# EAGLE board Qwiic_Lidar_Lite-Panel (EAGLE 9.4.2), part 1 of 3
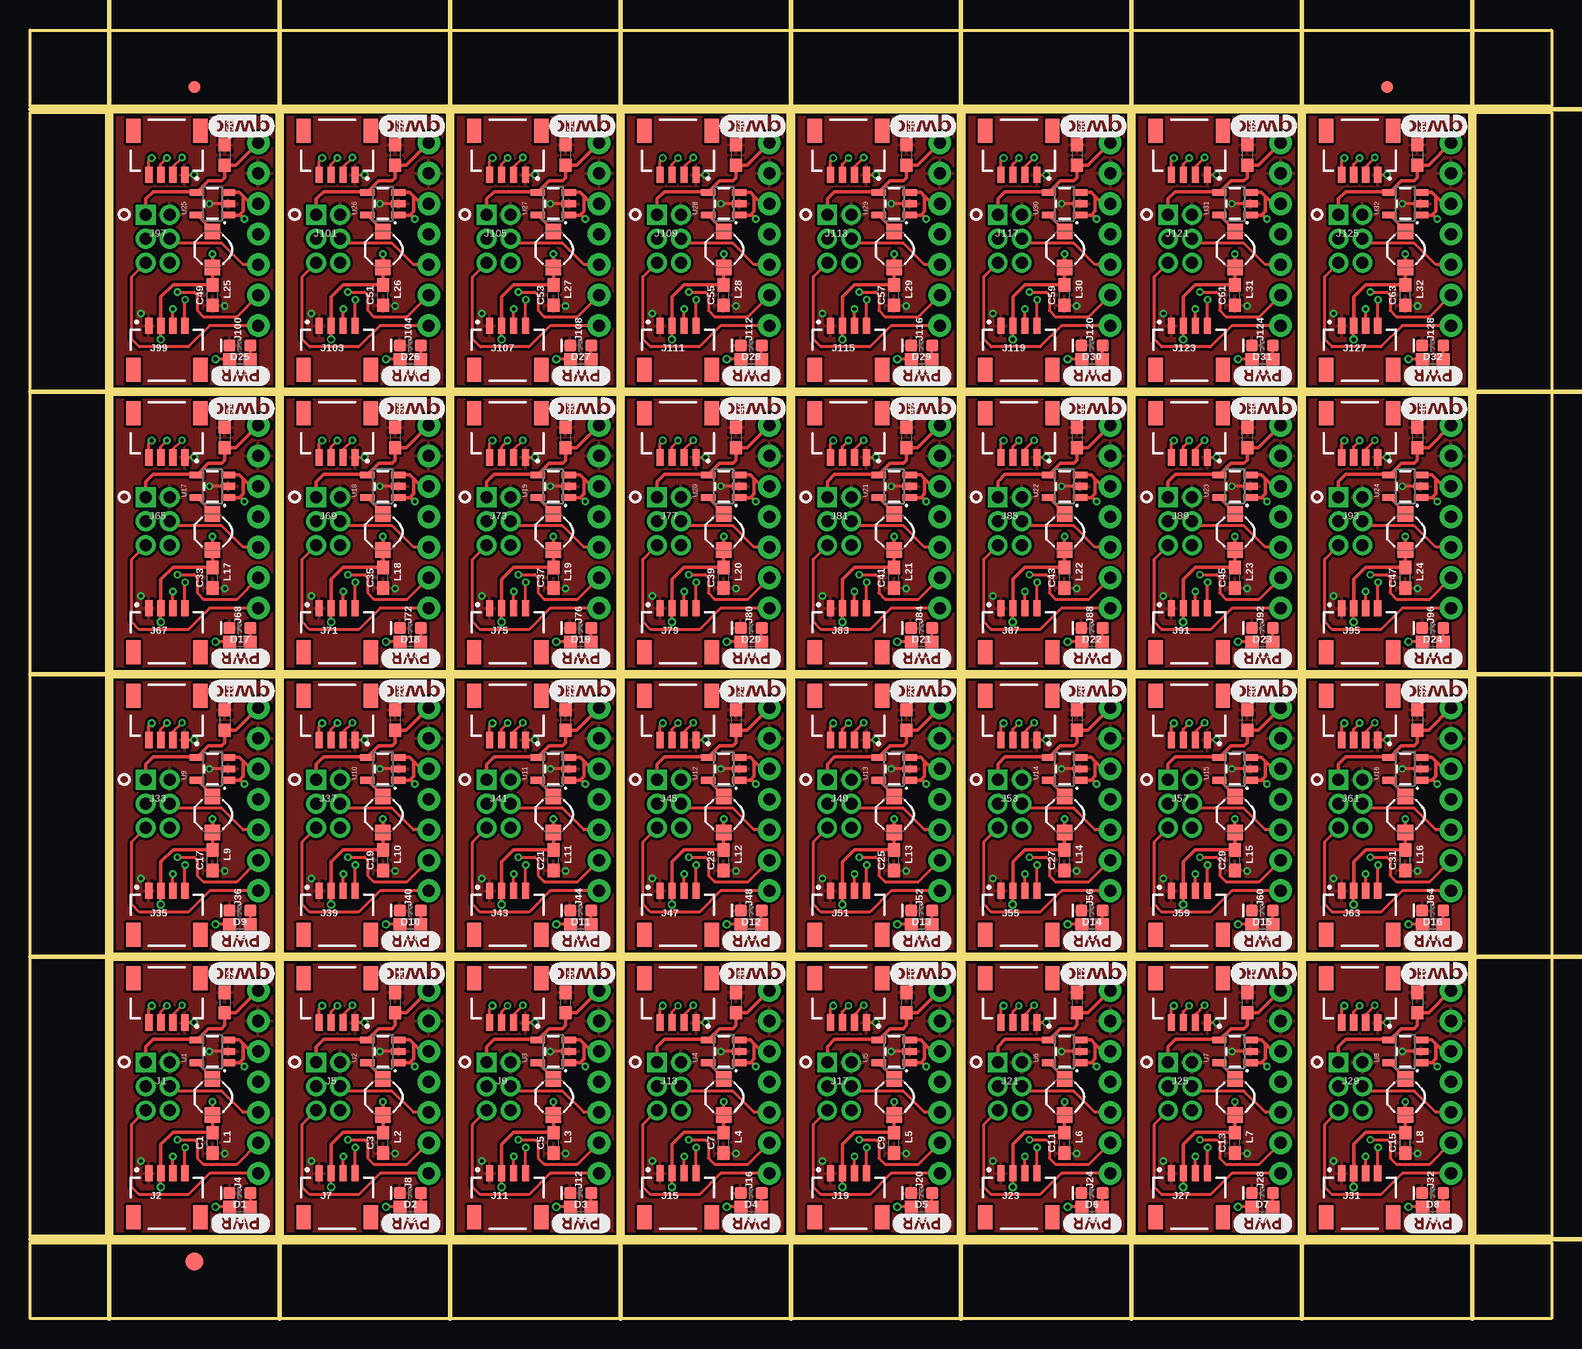
[diagram p0: board, top side]
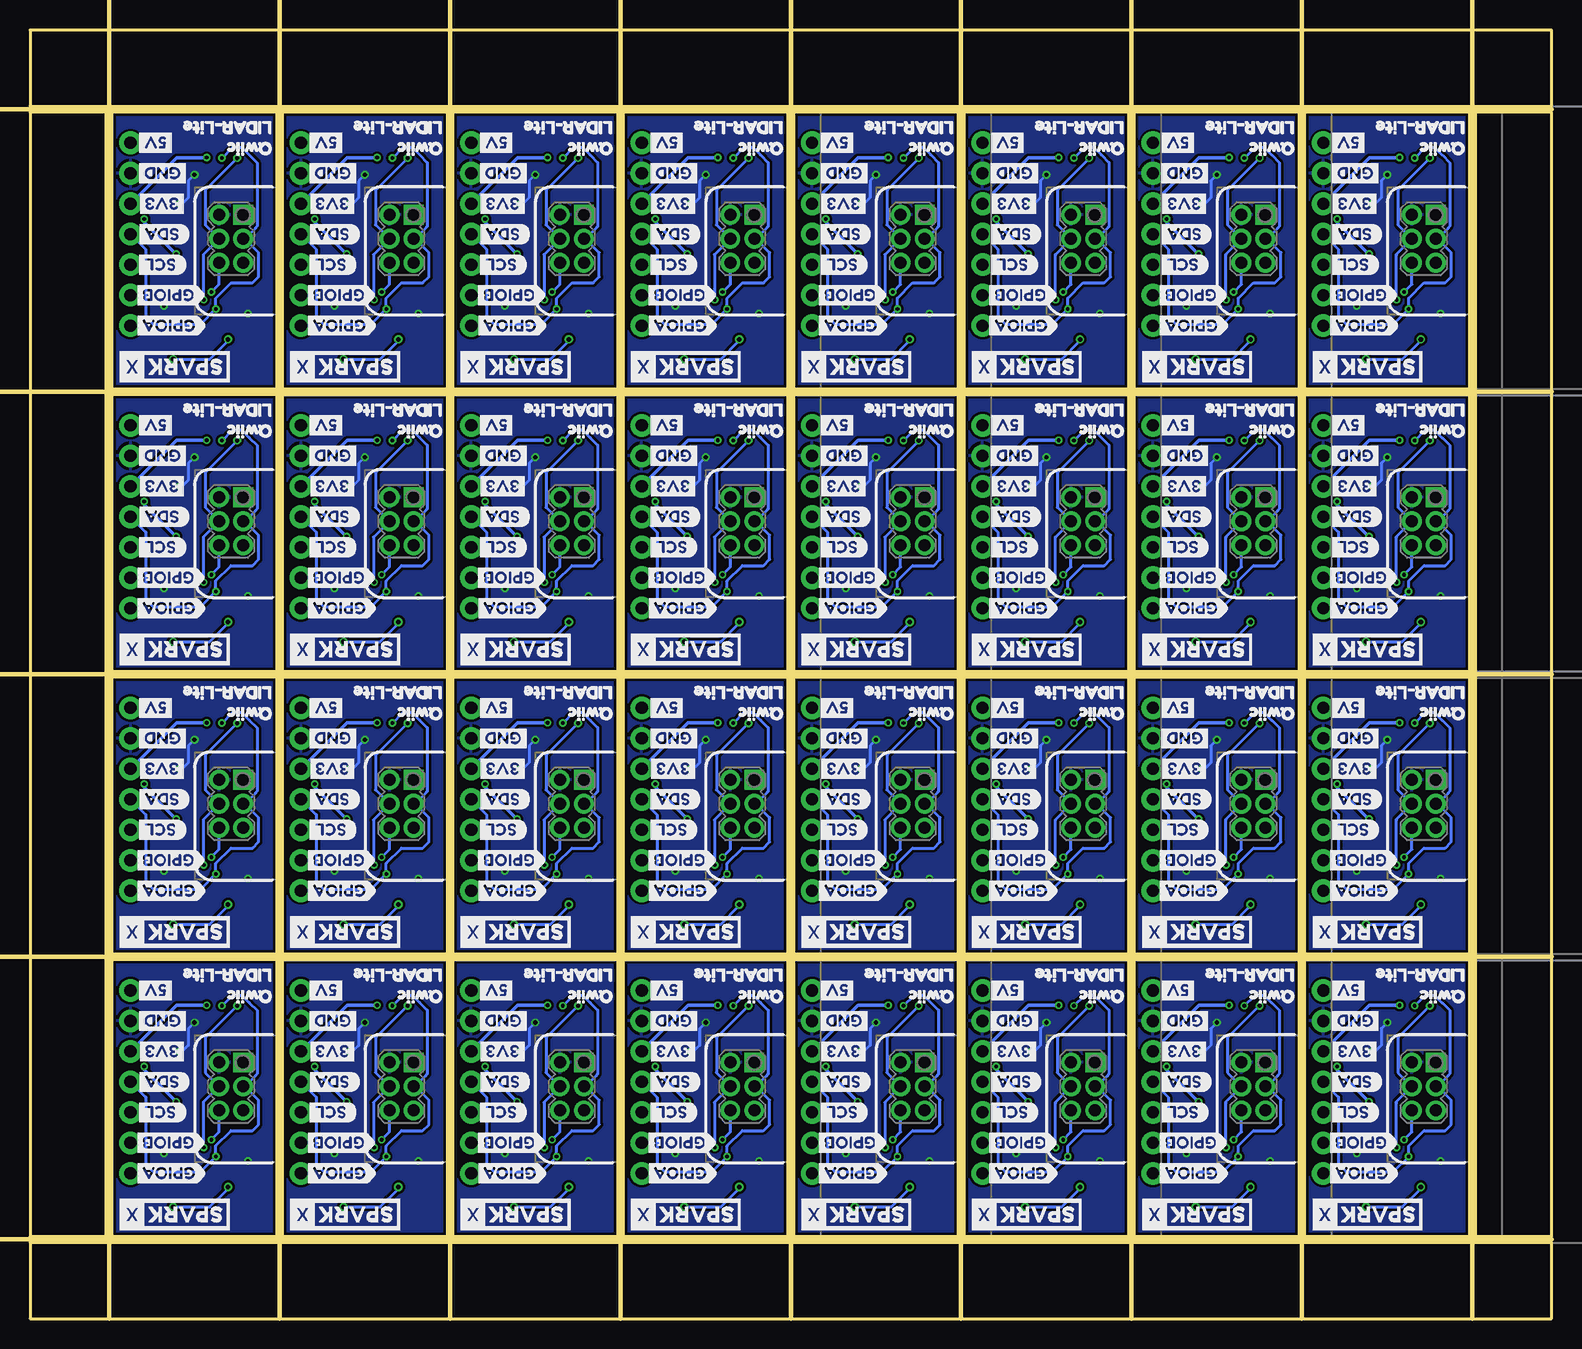
[diagram p1: board, bottom side, seen from below]

Size 126.84 x 107.39 mm. Coordinates in mm from the lower left corner, seen from the top.
Outline: 20.55,29.9 6.86,29.9 6.86,6.86 20.55,6.86 20.55,29.9
Outline: 34.76,29.9 21.06,29.9 21.06,6.86 34.76,6.86 34.76,29.9
Outline: 48.96,29.9 35.27,29.9 35.27,6.86 48.96,6.86 48.96,29.9
Outline: 63.17,29.9 49.47,29.9 49.47,6.86 63.17,6.86 63.17,29.9
Outline: 77.37,29.9 63.67,29.9 63.67,6.86 77.37,6.86 77.37,29.9
Outline: 91.57,29.9 77.88,29.9 77.88,6.86 91.57,6.86 91.57,29.9
Outline: 105.78,29.9 92.08,29.9 92.08,6.86 105.78,6.86 105.78,29.9
Outline: 119.98,29.9 106.29,29.9 106.29,6.86 119.98,6.86 119.98,29.9
Outline: 20.55,53.44 6.86,53.44 6.86,30.4 20.55,30.4 20.55,53.44
Outline: 34.76,53.44 21.06,53.44 21.06,30.4 34.76,30.4 34.76,53.44
Outline: 48.96,53.44 35.27,53.44 35.27,30.4 48.96,30.4 48.96,53.44
Outline: 63.17,53.44 49.47,53.44 49.47,30.4 63.17,30.4 63.17,53.44
Outline: 77.37,53.44 63.67,53.44 63.67,30.4 77.37,30.4 77.37,53.44
Outline: 91.57,53.44 77.88,53.44 77.88,30.4 91.57,30.4 91.57,53.44
Outline: 105.78,53.44 92.08,53.44 92.08,30.4 105.78,30.4 105.78,53.44
Outline: 119.98,53.44 106.29,53.44 106.29,30.4 119.98,30.4 119.98,53.44
Outline: 20.55,76.99 6.86,76.99 6.86,53.95 20.55,53.95 20.55,76.99
Outline: 34.76,76.99 21.06,76.99 21.06,53.95 34.76,53.95 34.76,76.99
Outline: 48.96,76.99 35.27,76.99 35.27,53.95 48.96,53.95 48.96,76.99
Outline: 63.17,76.99 49.47,76.99 49.47,53.95 63.17,53.95 63.17,76.99
Outline: 77.37,76.99 63.67,76.99 63.67,53.95 77.37,53.95 77.37,76.99
Outline: 91.57,76.99 77.88,76.99 77.88,53.95 91.57,53.95 91.57,76.99
Outline: 105.78,76.99 92.08,76.99 92.08,53.95 105.78,53.95 105.78,76.99
Outline: 119.98,76.99 106.29,76.99 106.29,53.95 119.98,53.95 119.98,76.99
Outline: 20.55,100.53 6.86,100.53 6.86,77.5 20.55,77.5 20.55,100.53
Outline: 34.76,100.53 21.06,100.53 21.06,77.5 34.76,77.5 34.76,100.53
Outline: 48.96,100.53 35.27,100.53 35.27,77.5 48.96,77.5 48.96,100.53
Outline: 63.17,100.53 49.47,100.53 49.47,77.5 63.17,77.5 63.17,100.53
Outline: 77.37,100.53 63.67,100.53 63.67,77.5 77.37,77.5 77.37,100.53
Outline: 91.57,100.53 77.88,100.53 77.88,77.5 91.57,77.5 91.57,100.53
Outline: 105.78,100.53 92.08,100.53 92.08,77.5 105.78,77.5 105.78,100.53
Outline: 119.98,100.53 106.29,100.53 106.29,77.5 119.98,77.5 119.98,100.53
Outline: 0,6.35 126.84,6.35 126.84,0 0,0 0,6.35
Outline: 120.49,100.53 126.84,100.53 126.84,6.86 120.49,6.86 120.49,100.53
Outline: 0,107.39 126.84,107.39 126.84,101.04 0,101.04 0,107.39
Outline: 0,100.53 6.35,100.53 6.35,6.86 0,6.86 0,100.53
Copper layers (1*16): Top 0.035mm / dielectric 1.5mm / Bottom 0.035mm
Design rules "SparkFun-2-layer-PCBWay-LIMIT": minimum track width 6mil, minimum drill 0.3mm, track to track 6mil, track to pad 6mil, pad to pad 6mil, via to via 6mil, smd to smd 6mil, copper to edge 6mil, drill to drill 6mil, minimum pad ring 6mil, minimum via ring 6mil, stop-mask expansion 4mil, vias tented up to drill 25mil, thermal gap 10mil
Milling: 14 lines

## Footprints (pad centres in the part's own frame; a part is rotated, then mirrored left to right if it is on the bottom)
0603 = smd 1.1 x 1: 1 -0.85,0; 2 0.85,0
LED-0603 = smd 1 x 1: A -0.877,0; C 0.877,0
FIDUCIAL-1X2 = smd 1 x 1: 1 0,0
FIDUCIAL-1.5X3 = smd 1.5 x 1.5: 1 0,0
JST04_1MM_RA = smd 0.6 x 1.35: 1 -1.5,0; 2 -0.5,0; 3 0.5,0; 4 1.5,0 | smd 1.2 x 2: NC1 2.8,-3.675; NC2 -2.8,-3.675
CONN_3X2_2MM = drill 1 pad 1.651 square: 1 -2,1 | drill 1 pad 1.651: 2 -2,-1; 3 0,1; 4 0,-1; 5 2,1; 6 2,-1
1X07_NO_SILK = drill 1.016 pad 1.88: 1 0,0; 2 2.54,0; 3 5.08,0; 4 7.62,0; 5 10.16,0; 6 12.7,0; 7 15.24,0
INDUCTOR_4.7UH = smd 1.3 x 1.3: P$1 -1.5,0; P$2 1.5,0
SOT23-5 = smd 0.55 x 1.2: 1 -0.95,-1.3; 2 0,-1.3; 3 0.95,-1.3; 4 0.95,1.3; 5 -0.95,1.3

## Placement (x,y rotation side)
C1  4.7uF  [0603]  15.22,14.66 90 top
C2  10uF  [0603]  16.24,26.34 270 top
C3  4.7uF  [0603]  29.42,14.66 90 top
C4  10uF  [0603]  30.44,26.34 270 top
C5  4.7uF  [0603]  43.63,14.66 90 top
C6  10uF  [0603]  44.64,26.34 270 top
C7  4.7uF  [0603]  57.83,14.66 90 top
C8  10uF  [0603]  58.85,26.34 270 top
C9  4.7uF  [0603]  72.04,14.66 90 top
C10  10uF  [0603]  73.05,26.34 270 top
C11  4.7uF  [0603]  86.24,14.66 90 top
C12  10uF  [0603]  87.26,26.34 270 top
C13  4.7uF  [0603]  100.44,14.66 90 top
C14  10uF  [0603]  101.46,26.34 270 top
C15  4.7uF  [0603]  114.65,14.66 90 top
C16  10uF  [0603]  115.66,26.34 270 top
C17  4.7uF  [0603]  15.22,38.2 90 top
C18  10uF  [0603]  16.24,49.89 270 top
C19  4.7uF  [0603]  29.42,38.2 90 top
C20  10uF  [0603]  30.44,49.89 270 top
C21  4.7uF  [0603]  43.63,38.2 90 top
C22  10uF  [0603]  44.64,49.89 270 top
C23  4.7uF  [0603]  57.83,38.2 90 top
C24  10uF  [0603]  58.85,49.89 270 top
C25  4.7uF  [0603]  72.04,38.2 90 top
C26  10uF  [0603]  73.05,49.89 270 top
C27  4.7uF  [0603]  86.24,38.2 90 top
C28  10uF  [0603]  87.26,49.89 270 top
C29  4.7uF  [0603]  100.44,38.2 90 top
C30  10uF  [0603]  101.46,49.89 270 top
C31  4.7uF  [0603]  114.65,38.2 90 top
C32  10uF  [0603]  115.66,49.89 270 top
C33  4.7uF  [0603]  15.22,61.75 90 top
C34  10uF  [0603]  16.24,73.43 270 top
C35  4.7uF  [0603]  29.42,61.75 90 top
C36  10uF  [0603]  30.44,73.43 270 top
C37  4.7uF  [0603]  43.63,61.75 90 top
C38  10uF  [0603]  44.64,73.43 270 top
C39  4.7uF  [0603]  57.83,61.75 90 top
C40  10uF  [0603]  58.85,73.43 270 top
C41  4.7uF  [0603]  72.04,61.75 90 top
C42  10uF  [0603]  73.05,73.43 270 top
C43  4.7uF  [0603]  86.24,61.75 90 top
C44  10uF  [0603]  87.26,73.43 270 top
C45  4.7uF  [0603]  100.44,61.75 90 top
C46  10uF  [0603]  101.46,73.43 270 top
C47  4.7uF  [0603]  114.65,61.75 90 top
C48  10uF  [0603]  115.66,73.43 270 top
C49  4.7uF  [0603]  15.22,85.29 90 top
C50  10uF  [0603]  16.24,96.98 270 top
C51  4.7uF  [0603]  29.42,85.29 90 top
C52  10uF  [0603]  30.44,96.98 270 top
C53  4.7uF  [0603]  43.63,85.29 90 top
C54  10uF  [0603]  44.64,96.98 270 top
C55  4.7uF  [0603]  57.83,85.29 90 top
C56  10uF  [0603]  58.85,96.98 270 top
C57  4.7uF  [0603]  72.04,85.29 90 top
C58  10uF  [0603]  73.05,96.98 270 top
C59  4.7uF  [0603]  86.24,85.29 90 top
C60  10uF  [0603]  87.26,96.98 270 top
C61  4.7uF  [0603]  100.44,85.29 90 top
C62  10uF  [0603]  101.46,96.98 270 top
C63  4.7uF  [0603]  114.65,85.29 90 top
C64  10uF  [0603]  115.66,96.98 270 top
D1  RED  [LED-0603]  17.51,10.47 180 top
D2  RED  [LED-0603]  31.71,10.47 180 top
D3  RED  [LED-0603]  45.91,10.47 180 top
D4  RED  [LED-0603]  60.12,10.47 180 top
D5  RED  [LED-0603]  74.32,10.47 180 top
D6  RED  [LED-0603]  88.53,10.47 180 top
D7  RED  [LED-0603]  102.73,10.47 180 top
D8  RED  [LED-0603]  116.93,10.47 180 top
D9  RED  [LED-0603]  17.51,34.01 180 top
D10  RED  [LED-0603]  31.71,34.01 180 top
D11  RED  [LED-0603]  45.91,34.01 180 top
D12  RED  [LED-0603]  60.12,34.01 180 top
D13  RED  [LED-0603]  74.32,34.01 180 top
D14  RED  [LED-0603]  88.53,34.01 180 top
D15  RED  [LED-0603]  102.73,34.01 180 top
D16  RED  [LED-0603]  116.93,34.01 180 top
D17  RED  [LED-0603]  17.51,57.56 180 top
D18  RED  [LED-0603]  31.71,57.56 180 top
D19  RED  [LED-0603]  45.91,57.56 180 top
D20  RED  [LED-0603]  60.12,57.56 180 top
D21  RED  [LED-0603]  74.32,57.56 180 top
D22  RED  [LED-0603]  88.53,57.56 180 top
D23  RED  [LED-0603]  102.73,57.56 180 top
D24  RED  [LED-0603]  116.93,57.56 180 top
D25  RED  [LED-0603]  17.51,81.1 180 top
D26  RED  [LED-0603]  31.71,81.1 180 top
D27  RED  [LED-0603]  45.91,81.1 180 top
D28  RED  [LED-0603]  60.12,81.1 180 top
D29  RED  [LED-0603]  74.32,81.1 180 top
D30  RED  [LED-0603]  88.53,81.1 180 top
D31  RED  [LED-0603]  102.73,81.1 180 top
D32  RED  [LED-0603]  116.93,81.1 180 top
E$1  [FIDUCIAL-1X2]  13.72,102.63 0 top
E$2  [FIDUCIAL-1X2]  113.12,102.63 0 top
E$3  [FIDUCIAL-1.5X3]  13.72,4.76 0 top
J1  [JST04_1MM_RA]  11.41,24.68 180 top
J2  [JST04_1MM_RA]  11.41,12.12 0 top
J3  [CONN_3X2_2MM]  10.65,19.36 270 bottom
J4  [1X07_NO_SILK]  19.03,12.12 90 top
J5  [JST04_1MM_RA]  25.61,24.68 180 top
J6  [CONN_3X2_2MM]  24.85,19.36 270 bottom
J7  [JST04_1MM_RA]  25.61,12.12 0 top
J8  [1X07_NO_SILK]  33.23,12.12 90 top
J9  [JST04_1MM_RA]  39.82,24.68 180 top
J10  [CONN_3X2_2MM]  39.06,19.36 270 bottom
J11  [JST04_1MM_RA]  39.82,12.12 0 top
J12  [1X07_NO_SILK]  47.44,12.12 90 top
J13  [JST04_1MM_RA]  54.02,24.68 180 top
J14  [CONN_3X2_2MM]  53.26,19.36 270 bottom
J15  [JST04_1MM_RA]  54.02,12.12 0 top
J16  [1X07_NO_SILK]  61.64,12.12 90 top
J17  [JST04_1MM_RA]  68.23,24.68 180 top
J18  [CONN_3X2_2MM]  67.46,19.36 270 bottom
J19  [JST04_1MM_RA]  68.23,12.12 0 top
J20  [1X07_NO_SILK]  75.85,12.12 90 top
J21  [JST04_1MM_RA]  82.43,24.68 180 top
J22  [CONN_3X2_2MM]  81.67,19.36 270 bottom
J23  [JST04_1MM_RA]  82.43,12.12 0 top
J24  [1X07_NO_SILK]  90.05,12.12 90 top
J25  [JST04_1MM_RA]  96.63,24.68 180 top
J26  [CONN_3X2_2MM]  95.87,19.36 270 bottom
J27  [JST04_1MM_RA]  96.63,12.12 0 top
J28  [1X07_NO_SILK]  104.25,12.12 90 top
J29  [JST04_1MM_RA]  110.84,24.68 180 top
J30  [CONN_3X2_2MM]  110.08,19.36 270 bottom
J31  [JST04_1MM_RA]  110.84,12.12 0 top
J32  [1X07_NO_SILK]  118.46,12.12 90 top
J33  [JST04_1MM_RA]  11.41,48.23 180 top
J34  [CONN_3X2_2MM]  10.65,42.9 270 bottom
J35  [JST04_1MM_RA]  11.41,35.66 0 top
J36  [1X07_NO_SILK]  19.03,35.66 90 top
J37  [JST04_1MM_RA]  25.61,48.23 180 top
J38  [CONN_3X2_2MM]  24.85,42.9 270 bottom
J39  [JST04_1MM_RA]  25.61,35.66 0 top
J40  [1X07_NO_SILK]  33.23,35.66 90 top
J41  [JST04_1MM_RA]  39.82,48.23 180 top
J42  [CONN_3X2_2MM]  39.06,42.9 270 bottom
J43  [JST04_1MM_RA]  39.82,35.66 0 top
J44  [1X07_NO_SILK]  47.44,35.66 90 top
J45  [JST04_1MM_RA]  54.02,48.23 180 top
J46  [CONN_3X2_2MM]  53.26,42.9 270 bottom
J47  [JST04_1MM_RA]  54.02,35.66 0 top
J48  [1X07_NO_SILK]  61.64,35.66 90 top
J49  [JST04_1MM_RA]  68.23,48.23 180 top
J50  [CONN_3X2_2MM]  67.46,42.9 270 bottom
J51  [JST04_1MM_RA]  68.23,35.66 0 top
J52  [1X07_NO_SILK]  75.85,35.66 90 top
J53  [JST04_1MM_RA]  82.43,48.23 180 top
J54  [CONN_3X2_2MM]  81.67,42.9 270 bottom
J55  [JST04_1MM_RA]  82.43,35.66 0 top
J56  [1X07_NO_SILK]  90.05,35.66 90 top
J57  [JST04_1MM_RA]  96.63,48.23 180 top
J58  [CONN_3X2_2MM]  95.87,42.9 270 bottom
J59  [JST04_1MM_RA]  96.63,35.66 0 top
J60  [1X07_NO_SILK]  104.25,35.66 90 top
J61  [JST04_1MM_RA]  110.84,48.23 180 top
J62  [CONN_3X2_2MM]  110.08,42.9 270 bottom
J63  [JST04_1MM_RA]  110.84,35.66 0 top
J64  [1X07_NO_SILK]  118.46,35.66 90 top
J65  [JST04_1MM_RA]  11.41,71.77 180 top
J66  [CONN_3X2_2MM]  10.65,66.45 270 bottom
J67  [JST04_1MM_RA]  11.41,59.21 0 top
J68  [1X07_NO_SILK]  19.03,59.21 90 top
J69  [JST04_1MM_RA]  25.61,71.77 180 top
J70  [CONN_3X2_2MM]  24.85,66.45 270 bottom
J71  [JST04_1MM_RA]  25.61,59.21 0 top
J72  [1X07_NO_SILK]  33.23,59.21 90 top
J73  [JST04_1MM_RA]  39.82,71.77 180 top
J74  [CONN_3X2_2MM]  39.06,66.45 270 bottom
J75  [JST04_1MM_RA]  39.82,59.21 0 top
J76  [1X07_NO_SILK]  47.44,59.21 90 top
J77  [JST04_1MM_RA]  54.02,71.77 180 top
J78  [CONN_3X2_2MM]  53.26,66.45 270 bottom
J79  [JST04_1MM_RA]  54.02,59.21 0 top
J80  [1X07_NO_SILK]  61.64,59.21 90 top
J81  [JST04_1MM_RA]  68.23,71.77 180 top
J82  [CONN_3X2_2MM]  67.46,66.45 270 bottom
J83  [JST04_1MM_RA]  68.23,59.21 0 top
J84  [1X07_NO_SILK]  75.85,59.21 90 top
J85  [JST04_1MM_RA]  82.43,71.77 180 top
J86  [CONN_3X2_2MM]  81.67,66.45 270 bottom
J87  [JST04_1MM_RA]  82.43,59.21 0 top
J88  [1X07_NO_SILK]  90.05,59.21 90 top
J89  [JST04_1MM_RA]  96.63,71.77 180 top
J90  [CONN_3X2_2MM]  95.87,66.45 270 bottom
J91  [JST04_1MM_RA]  96.63,59.21 0 top
J92  [1X07_NO_SILK]  104.25,59.21 90 top
J93  [JST04_1MM_RA]  110.84,71.77 180 top
J94  [CONN_3X2_2MM]  110.08,66.45 270 bottom
J95  [JST04_1MM_RA]  110.84,59.21 0 top
J96  [1X07_NO_SILK]  118.46,59.21 90 top
J97  [JST04_1MM_RA]  11.41,95.32 180 top
J98  [CONN_3X2_2MM]  10.65,89.99 270 bottom
J99  [JST04_1MM_RA]  11.41,82.75 0 top
J100  [1X07_NO_SILK]  19.03,82.75 90 top
J101  [JST04_1MM_RA]  25.61,95.32 180 top
J102  [CONN_3X2_2MM]  24.85,89.99 270 bottom
J103  [JST04_1MM_RA]  25.61,82.75 0 top
J104  [1X07_NO_SILK]  33.23,82.75 90 top
J105  [JST04_1MM_RA]  39.82,95.32 180 top
J106  [CONN_3X2_2MM]  39.06,89.99 270 bottom
J107  [JST04_1MM_RA]  39.82,82.75 0 top
J108  [1X07_NO_SILK]  47.44,82.75 90 top
J109  [JST04_1MM_RA]  54.02,95.32 180 top
J110  [CONN_3X2_2MM]  53.26,89.99 270 bottom
J111  [JST04_1MM_RA]  54.02,82.75 0 top
J112  [1X07_NO_SILK]  61.64,82.75 90 top
J113  [JST04_1MM_RA]  68.23,95.32 180 top
J114  [CONN_3X2_2MM]  67.46,89.99 270 bottom
J115  [JST04_1MM_RA]  68.23,82.75 0 top
J116  [1X07_NO_SILK]  75.85,82.75 90 top
J117  [JST04_1MM_RA]  82.43,95.32 180 top
J118  [CONN_3X2_2MM]  81.67,89.99 270 bottom
J119  [JST04_1MM_RA]  82.43,82.75 0 top
J120  [1X07_NO_SILK]  90.05,82.75 90 top
J121  [JST04_1MM_RA]  96.63,95.32 180 top
J122  [CONN_3X2_2MM]  95.87,89.99 270 bottom
J123  [JST04_1MM_RA]  96.63,82.75 0 top
J124  [1X07_NO_SILK]  104.25,82.75 90 top
J125  [JST04_1MM_RA]  110.84,95.32 180 top
J126  [CONN_3X2_2MM]  110.08,89.99 270 bottom
J127  [JST04_1MM_RA]  110.84,82.75 0 top
J128  [1X07_NO_SILK]  118.46,82.75 90 top
L1  4.7µH/±30%/1.2A  [INDUCTOR_4.7UH]  15.22,18.47 90 top
L2  4.7µH/±30%/1.2A  [INDUCTOR_4.7UH]  29.42,18.47 90 top
L3  4.7µH/±30%/1.2A  [INDUCTOR_4.7UH]  43.63,18.47 90 top
L4  4.7µH/±30%/1.2A  [INDUCTOR_4.7UH]  57.83,18.47 90 top
L5  4.7µH/±30%/1.2A  [INDUCTOR_4.7UH]  72.04,18.47 90 top
L6  4.7µH/±30%/1.2A  [INDUCTOR_4.7UH]  86.24,18.47 90 top
L7  4.7µH/±30%/1.2A  [INDUCTOR_4.7UH]  100.44,18.47 90 top
L8  4.7µH/±30%/1.2A  [INDUCTOR_4.7UH]  114.65,18.47 90 top
L9  4.7µH/±30%/1.2A  [INDUCTOR_4.7UH]  15.22,42.01 90 top
L10  4.7µH/±30%/1.2A  [INDUCTOR_4.7UH]  29.42,42.01 90 top
L11  4.7µH/±30%/1.2A  [INDUCTOR_4.7UH]  43.63,42.01 90 top
L12  4.7µH/±30%/1.2A  [INDUCTOR_4.7UH]  57.83,42.01 90 top
L13  4.7µH/±30%/1.2A  [INDUCTOR_4.7UH]  72.04,42.01 90 top
L14  4.7µH/±30%/1.2A  [INDUCTOR_4.7UH]  86.24,42.01 90 top
L15  4.7µH/±30%/1.2A  [INDUCTOR_4.7UH]  100.44,42.01 90 top
L16  4.7µH/±30%/1.2A  [INDUCTOR_4.7UH]  114.65,42.01 90 top
L17  4.7µH/±30%/1.2A  [INDUCTOR_4.7UH]  15.22,65.56 90 top
L18  4.7µH/±30%/1.2A  [INDUCTOR_4.7UH]  29.42,65.56 90 top
L19  4.7µH/±30%/1.2A  [INDUCTOR_4.7UH]  43.63,65.56 90 top
L20  4.7µH/±30%/1.2A  [INDUCTOR_4.7UH]  57.83,65.56 90 top
L21  4.7µH/±30%/1.2A  [INDUCTOR_4.7UH]  72.04,65.56 90 top
L22  4.7µH/±30%/1.2A  [INDUCTOR_4.7UH]  86.24,65.56 90 top
L23  4.7µH/±30%/1.2A  [INDUCTOR_4.7UH]  100.44,65.56 90 top
L24  4.7µH/±30%/1.2A  [INDUCTOR_4.7UH]  114.65,65.56 90 top
L25  4.7µH/±30%/1.2A  [INDUCTOR_4.7UH]  15.22,89.1 90 top
L26  4.7µH/±30%/1.2A  [INDUCTOR_4.7UH]  29.42,89.1 90 top
L27  4.7µH/±30%/1.2A  [INDUCTOR_4.7UH]  43.63,89.1 90 top
L28  4.7µH/±30%/1.2A  [INDUCTOR_4.7UH]  57.83,89.1 90 top
L29  4.7µH/±30%/1.2A  [INDUCTOR_4.7UH]  72.04,89.1 90 top
L30  4.7µH/±30%/1.2A  [INDUCTOR_4.7UH]  86.24,89.1 90 top
L31  4.7µH/±30%/1.2A  [INDUCTOR_4.7UH]  100.44,89.1 90 top
L32  4.7µH/±30%/1.2A  [INDUCTOR_4.7UH]  114.65,89.1 90 top
LOGO1  QWIIC_LOGO_CONNECTOR  [QWIIC_5.5MM]  17.63,28.75 180 top
LOGO2  QWIIC_LOGO_CONNECTOR  [QWIIC_5.5MM]  31.84,28.75 180 top
LOGO3  QWIIC_LOGO_CONNECTOR  [QWIIC_5.5MM]  46.04,28.75 180 top
LOGO4  QWIIC_LOGO_CONNECTOR  [QWIIC_5.5MM]  60.25,28.75 180 top
LOGO5  QWIIC_LOGO_CONNECTOR  [QWIIC_5.5MM]  74.45,28.75 180 top
LOGO6  QWIIC_LOGO_CONNECTOR  [QWIIC_5.5MM]  88.65,28.75 180 top
LOGO7  QWIIC_LOGO_CONNECTOR  [QWIIC_5.5MM]  102.86,28.75 180 top
LOGO8  QWIIC_LOGO_CONNECTOR  [QWIIC_5.5MM]  117.06,28.75 180 top
LOGO9  QWIIC_LOGO_CONNECTOR  [QWIIC_5.5MM]  17.63,52.3 180 top
LOGO10  QWIIC_LOGO_CONNECTOR  [QWIIC_5.5MM]  31.84,52.3 180 top
LOGO11  QWIIC_LOGO_CONNECTOR  [QWIIC_5.5MM]  46.04,52.3 180 top
LOGO12  QWIIC_LOGO_CONNECTOR  [QWIIC_5.5MM]  60.25,52.3 180 top
LOGO13  QWIIC_LOGO_CONNECTOR  [QWIIC_5.5MM]  74.45,52.3 180 top
LOGO14  QWIIC_LOGO_CONNECTOR  [QWIIC_5.5MM]  88.65,52.3 180 top
LOGO15  QWIIC_LOGO_CONNECTOR  [QWIIC_5.5MM]  102.86,52.3 180 top
LOGO16  QWIIC_LOGO_CONNECTOR  [QWIIC_5.5MM]  117.06,52.3 180 top
LOGO17  QWIIC_LOGO_CONNECTOR  [QWIIC_5.5MM]  17.63,75.85 180 top
LOGO18  QWIIC_LOGO_CONNECTOR  [QWIIC_5.5MM]  31.84,75.85 180 top
LOGO19  QWIIC_LOGO_CONNECTOR  [QWIIC_5.5MM]  46.04,75.85 180 top
LOGO20  QWIIC_LOGO_CONNECTOR  [QWIIC_5.5MM]  60.25,75.85 180 top
LOGO21  QWIIC_LOGO_CONNECTOR  [QWIIC_5.5MM]  74.45,75.85 180 top
LOGO22  QWIIC_LOGO_CONNECTOR  [QWIIC_5.5MM]  88.65,75.85 180 top
LOGO23  QWIIC_LOGO_CONNECTOR  [QWIIC_5.5MM]  102.86,75.85 180 top
LOGO24  QWIIC_LOGO_CONNECTOR  [QWIIC_5.5MM]  117.06,75.85 180 top
LOGO25  QWIIC_LOGO_CONNECTOR  [QWIIC_5.5MM]  17.63,99.39 180 top
LOGO26  QWIIC_LOGO_CONNECTOR  [QWIIC_5.5MM]  31.84,99.39 180 top
LOGO27  QWIIC_LOGO_CONNECTOR  [QWIIC_5.5MM]  46.04,99.39 180 top
LOGO28  QWIIC_LOGO_CONNECTOR  [QWIIC_5.5MM]  60.25,99.39 180 top
LOGO29  QWIIC_LOGO_CONNECTOR  [QWIIC_5.5MM]  74.45,99.39 180 top
LOGO30  QWIIC_LOGO_CONNECTOR  [QWIIC_5.5MM]  88.65,99.39 180 top
LOGO31  QWIIC_LOGO_CONNECTOR  [QWIIC_5.5MM]  102.86,99.39 180 top
LOGO32  QWIIC_LOGO_CONNECTOR  [QWIIC_5.5MM]  117.06,99.39 180 top
R1  1k  [0603]  17.51,9.32 180 top
R2  1k  [0603]  31.71,9.32 180 top
R3  1k  [0603]  45.91,9.32 180 top
R4  1k  [0603]  60.12,9.32 180 top
R5  1k  [0603]  74.32,9.32 180 top
R6  1k  [0603]  88.53,9.32 180 top
R7  1k  [0603]  102.73,9.32 180 top
R8  1k  [0603]  116.93,9.32 180 top
R9  1k  [0603]  17.51,32.87 180 top
R10  1k  [0603]  31.71,32.87 180 top
R11  1k  [0603]  45.91,32.87 180 top
R12  1k  [0603]  60.12,32.87 180 top
R13  1k  [0603]  74.32,32.87 180 top
R14  1k  [0603]  88.53,32.87 180 top
R15  1k  [0603]  102.73,32.87 180 top
R16  1k  [0603]  116.93,32.87 180 top
R17  1k  [0603]  17.51,56.41 180 top
R18  1k  [0603]  31.71,56.41 180 top
R19  1k  [0603]  45.91,56.41 180 top
R20  1k  [0603]  60.12,56.41 180 top
R21  1k  [0603]  74.32,56.41 180 top
R22  1k  [0603]  88.53,56.41 180 top
R23  1k  [0603]  102.73,56.41 180 top
R24  1k  [0603]  116.93,56.41 180 top
R25  1k  [0603]  17.51,79.96 180 top
R26  1k  [0603]  31.71,79.96 180 top
R27  1k  [0603]  45.91,79.96 180 top
R28  1k  [0603]  60.12,79.96 180 top
R29  1k  [0603]  74.32,79.96 180 top
R30  1k  [0603]  88.53,79.96 180 top
R31  1k  [0603]  102.73,79.96 180 top
R32  1k  [0603]  116.93,79.96 180 top
U1  XC9140  [SOT23-5]  15.22,22.28 90 top
U2  XC9140  [SOT23-5]  29.42,22.28 90 top
U3  XC9140  [SOT23-5]  43.63,22.28 90 top
U4  XC9140  [SOT23-5]  57.83,22.28 90 top
U5  XC9140  [SOT23-5]  72.04,22.28 90 top
U6  XC9140  [SOT23-5]  86.24,22.28 90 top
U7  XC9140  [SOT23-5]  100.44,22.28 90 top
U8  XC9140  [SOT23-5]  114.65,22.28 90 top
U9  XC9140  [SOT23-5]  15.22,45.82 90 top
U10  XC9140  [SOT23-5]  29.42,45.82 90 top
U11  XC9140  [SOT23-5]  43.63,45.82 90 top
U12  XC9140  [SOT23-5]  57.83,45.82 90 top
U13  XC9140  [SOT23-5]  72.04,45.82 90 top
U14  XC9140  [SOT23-5]  86.24,45.82 90 top
U15  XC9140  [SOT23-5]  100.44,45.82 90 top
U16  XC9140  [SOT23-5]  114.65,45.82 90 top
U17  XC9140  [SOT23-5]  15.22,69.37 90 top
U18  XC9140  [SOT23-5]  29.42,69.37 90 top
U19  XC9140  [SOT23-5]  43.63,69.37 90 top
U20  XC9140  [SOT23-5]  57.83,69.37 90 top
U21  XC9140  [SOT23-5]  72.04,69.37 90 top
U22  XC9140  [SOT23-5]  86.24,69.37 90 top
U23  XC9140  [SOT23-5]  100.44,69.37 90 top
U24  XC9140  [SOT23-5]  114.65,69.37 90 top
U25  XC9140  [SOT23-5]  15.22,92.91 90 top
U26  XC9140  [SOT23-5]  29.42,92.91 90 top
U27  XC9140  [SOT23-5]  43.63,92.91 90 top
U28  XC9140  [SOT23-5]  57.83,92.91 90 top
U29  XC9140  [SOT23-5]  72.04,92.91 90 top
U30  XC9140  [SOT23-5]  86.24,92.91 90 top
U31  XC9140  [SOT23-5]  100.44,92.91 90 top
U32  XC9140  [SOT23-5]  114.65,92.91 90 top
U$1  [GND3]  13.95,24.82 180 bottom
U$2  [3V30]  14.08,22.28 180 bottom
U$3  [GPIOA5]  12.68,12.12 180 bottom
U$4  [GPIOB2]  12.81,14.66 180 bottom
U$5  [SCL1]  14.33,17.2 180 bottom
U$6  [SDA4]  14.08,19.74 180 bottom
U$7  LIDAR_LITE  [LIDAR_LITE]  -16.02,18.34 180 bottom  (outside the outline)
U$8  SPARKX-LOGO4  [SPARKX-MEDIUM]  15.35,8.69 180 bottom
U$9  [QWIIC0]  6.33,26.85 180 bottom
U$10  [5V0]  15.09,27.36 180 bottom
U$11  [LIDAR#LITE1]  6.33,28.63 180 bottom
U$12  [PWR0]  20.05,7.93 180 top
U$13  LIDAR_LITE  [LIDAR_LITE]  -1.82,18.34 180 bottom
U$14  [GND3]  28.15,24.82 180 bottom
U$15  [3V30]  28.28,22.28 180 bottom
U$16  SPARKX-LOGO4  [SPARKX-MEDIUM]  29.55,8.69 180 bottom
U$17  [GPIOB2]  27.01,14.66 180 bottom
U$18  [SCL1]  28.54,17.2 180 bottom
U$19  [SDA4]  28.28,19.74 180 bottom
U$20  [5V0]  29.3,27.36 180 bottom
U$21  [GPIOA5]  26.88,12.12 180 bottom
U$22  [QWIIC0]  20.53,26.85 180 bottom
U$23  [LIDAR#LITE1]  20.53,28.63 180 bottom
U$24  [PWR0]  34.25,7.93 180 top
U$25  LIDAR_LITE  [LIDAR_LITE]  12.39,18.34 180 bottom
U$26  [GND3]  42.36,24.82 180 bottom
U$27  [3V30]  42.49,22.28 180 bottom
U$28  SPARKX-LOGO4  [SPARKX-MEDIUM]  43.76,8.69 180 bottom
U$29  [GPIOB2]  41.22,14.66 180 bottom
U$30  [SCL1]  42.74,17.2 180 bottom
U$31  [SDA4]  42.49,19.74 180 bottom
U$32  [5V0]  43.5,27.36 180 bottom
U$33  [GPIOA5]  41.09,12.12 180 bottom
U$34  [QWIIC0]  34.74,26.85 180 bottom
U$35  [LIDAR#LITE1]  34.74,28.63 180 bottom
U$36  [PWR0]  48.45,7.93 180 top
U$37  LIDAR_LITE  [LIDAR_LITE]  26.59,18.34 180 bottom
U$38  [GND3]  56.56,24.82 180 bottom
U$39  [3V30]  56.69,22.28 180 bottom
U$40  SPARKX-LOGO4  [SPARKX-MEDIUM]  57.96,8.69 180 bottom
U$41  [GPIOB2]  55.42,14.66 180 bottom
U$42  [SCL1]  56.94,17.2 180 bottom
U$43  [SDA4]  56.69,19.74 180 bottom
U$44  [5V0]  57.71,27.36 180 bottom
U$45  [GPIOA5]  55.29,12.12 180 bottom
U$46  [QWIIC0]  48.94,26.85 180 bottom
U$47  [LIDAR#LITE1]  48.94,28.63 180 bottom
U$48  [PWR0]  62.66,7.93 180 top
U$49  LIDAR_LITE  [LIDAR_LITE]  40.79,18.34 180 bottom
U$50  [GND3]  70.77,24.82 180 bottom
U$51  [3V30]  70.89,22.28 180 bottom
U$52  SPARKX-LOGO4  [SPARKX-MEDIUM]  72.16,8.69 180 bottom
U$53  [GPIOB2]  69.62,14.66 180 bottom
U$54  [SCL1]  71.15,17.2 180 bottom
U$55  [SDA4]  70.89,19.74 180 bottom
U$56  [5V0]  71.91,27.36 180 bottom
U$57  [GPIOA5]  69.5,12.12 180 bottom
U$58  [QWIIC0]  63.15,26.85 180 bottom
U$59  [LIDAR#LITE1]  63.15,28.63 180 bottom
U$60  [PWR0]  76.86,7.93 180 top
U$61  LIDAR_LITE  [LIDAR_LITE]  55,18.34 180 bottom
U$62  [GND3]  84.97,24.82 180 bottom
U$63  [3V30]  85.1,22.28 180 bottom
U$64  SPARKX-LOGO4  [SPARKX-MEDIUM]  86.37,8.69 180 bottom
U$65  [GPIOB2]  83.83,14.66 180 bottom
U$66  [SCL1]  85.35,17.2 180 bottom
U$67  [SDA4]  85.1,19.74 180 bottom
U$68  [5V0]  86.11,27.36 180 bottom
U$69  [GPIOA5]  83.7,12.12 180 bottom
U$70  [QWIIC0]  77.35,26.85 180 bottom
U$71  [LIDAR#LITE1]  77.35,28.63 180 bottom
U$72  [PWR0]  91.07,7.93 180 top
U$73  LIDAR_LITE  [LIDAR_LITE]  69.2,18.34 180 bottom
U$74  [GND3]  99.17,24.82 180 bottom
U$75  [3V30]  99.3,22.28 180 bottom
U$76  SPARKX-LOGO4  [SPARKX-MEDIUM]  100.57,8.69 180 bottom
U$77  [GPIOB2]  98.03,14.66 180 bottom
U$78  [SCL1]  99.56,17.2 180 bottom
U$79  [SDA4]  99.3,19.74 180 bottom
U$80  [5V0]  100.32,27.36 180 bottom
U$81  [GPIOA5]  97.9,12.12 180 bottom
U$82  [QWIIC0]  91.55,26.85 180 bottom
U$83  [LIDAR#LITE1]  91.55,28.63 180 bottom
U$84  [PWR0]  105.27,7.93 180 top
U$85  LIDAR_LITE  [LIDAR_LITE]  83.41,18.34 180 bottom
U$86  [GND3]  113.38,24.82 180 bottom
U$87  [3V30]  113.51,22.28 180 bottom
U$88  SPARKX-LOGO4  [SPARKX-MEDIUM]  114.78,8.69 180 bottom
U$89  [GPIOB2]  112.24,14.66 180 bottom
U$90  [SCL1]  113.76,17.2 180 bottom
U$91  [SDA4]  113.51,19.74 180 bottom
U$92  [5V0]  114.52,27.36 180 bottom
U$93  [GPIOA5]  112.11,12.12 180 bottom
U$94  [QWIIC0]  105.76,26.85 180 bottom
U$95  [LIDAR#LITE1]  105.76,28.63 180 bottom
U$96  [PWR0]  119.47,7.93 180 top
U$97  LIDAR_LITE  [LIDAR_LITE]  -16.02,41.89 180 bottom  (outside the outline)
U$98  [GND3]  13.95,48.36 180 bottom
U$99  [3V30]  14.08,45.82 180 bottom
U$100  SPARKX-LOGO4  [SPARKX-MEDIUM]  15.35,32.23 180 bottom
U$101  [GPIOB2]  12.81,38.2 180 bottom
U$102  [SCL1]  14.33,40.74 180 bottom
U$103  [SDA4]  14.08,43.28 180 bottom
U$104  [5V0]  15.09,50.9 180 bottom
U$105  [GPIOA5]  12.68,35.66 180 bottom
U$106  [QWIIC0]  6.33,50.39 180 bottom
U$107  [LIDAR#LITE1]  6.33,52.17 180 bottom
U$108  [PWR0]  20.05,31.47 180 top
U$109  LIDAR_LITE  [LIDAR_LITE]  -1.82,41.89 180 bottom
U$110  [GND3]  28.15,48.36 180 bottom
U$111  [3V30]  28.28,45.82 180 bottom
U$112  SPARKX-LOGO4  [SPARKX-MEDIUM]  29.55,32.23 180 bottom
U$113  [GPIOB2]  27.01,38.2 180 bottom
U$114  [SCL1]  28.54,40.74 180 bottom
U$115  [SDA4]  28.28,43.28 180 bottom
U$116  [5V0]  29.3,50.9 180 bottom
U$117  [GPIOA5]  26.88,35.66 180 bottom
U$118  [QWIIC0]  20.53,50.39 180 bottom
U$119  [LIDAR#LITE1]  20.53,52.17 180 bottom
U$120  [PWR0]  34.25,31.47 180 top
U$121  LIDAR_LITE  [LIDAR_LITE]  12.39,41.89 180 bottom
U$122  [GND3]  42.36,48.36 180 bottom
U$123  [3V30]  42.49,45.82 180 bottom
U$124  SPARKX-LOGO4  [SPARKX-MEDIUM]  43.76,32.23 180 bottom
U$125  [GPIOB2]  41.22,38.2 180 bottom
U$126  [SCL1]  42.74,40.74 180 bottom
U$127  [SDA4]  42.49,43.28 180 bottom
U$128  [5V0]  43.5,50.9 180 bottom
U$129  [GPIOA5]  41.09,35.66 180 bottom
U$130  [QWIIC0]  34.74,50.39 180 bottom
U$131  [LIDAR#LITE1]  34.74,52.17 180 bottom
U$132  [PWR0]  48.45,31.47 180 top
U$133  LIDAR_LITE  [LIDAR_LITE]  26.59,41.89 180 bottom
U$134  [GND3]  56.56,48.36 180 bottom
U$135  [3V30]  56.69,45.82 180 bottom
U$136  SPARKX-LOGO4  [SPARKX-MEDIUM]  57.96,32.23 180 bottom
U$137  [GPIOB2]  55.42,38.2 180 bottom
U$138  [SCL1]  56.94,40.74 180 bottom
U$139  [SDA4]  56.69,43.28 180 bottom
U$140  [5V0]  57.71,50.9 180 bottom
U$141  [GPIOA5]  55.29,35.66 180 bottom
U$142  [QWIIC0]  48.94,50.39 180 bottom
U$143  [LIDAR#LITE1]  48.94,52.17 180 bottom
U$144  [PWR0]  62.66,31.47 180 top
U$145  LIDAR_LITE  [LIDAR_LITE]  40.79,41.89 180 bottom
U$146  [GND3]  70.77,48.36 180 bottom
U$147  [3V30]  70.89,45.82 180 bottom
U$148  SPARKX-LOGO4  [SPARKX-MEDIUM]  72.16,32.23 180 bottom
U$149  [GPIOB2]  69.62,38.2 180 bottom
U$150  [SCL1]  71.15,40.74 180 bottom
U$151  [SDA4]  70.89,43.28 180 bottom
U$152  [5V0]  71.91,50.9 180 bottom
U$153  [GPIOA5]  69.5,35.66 180 bottom
U$154  [QWIIC0]  63.15,50.39 180 bottom
U$155  [LIDAR#LITE1]  63.15,52.17 180 bottom
U$156  [PWR0]  76.86,31.47 180 top
U$157  LIDAR_LITE  [LIDAR_LITE]  55,41.89 180 bottom
U$158  [GND3]  84.97,48.36 180 bottom
U$159  [3V30]  85.1,45.82 180 bottom
U$160  SPARKX-LOGO4  [SPARKX-MEDIUM]  86.37,32.23 180 bottom
U$161  [GPIOB2]  83.83,38.2 180 bottom
U$162  [SCL1]  85.35,40.74 180 bottom
U$163  [SDA4]  85.1,43.28 180 bottom
U$164  [5V0]  86.11,50.9 180 bottom
U$165  [GPIOA5]  83.7,35.66 180 bottom
U$166  [QWIIC0]  77.35,50.39 180 bottom
U$167  [LIDAR#LITE1]  77.35,52.17 180 bottom
U$168  [PWR0]  91.07,31.47 180 top
U$169  LIDAR_LITE  [LIDAR_LITE]  69.2,41.89 180 bottom
U$170  [GND3]  99.17,48.36 180 bottom
U$171  [3V30]  99.3,45.82 180 bottom
U$172  SPARKX-LOGO4  [SPARKX-MEDIUM]  100.57,32.23 180 bottom
U$173  [GPIOB2]  98.03,38.2 180 bottom
U$174  [SCL1]  99.56,40.74 180 bottom
U$175  [SDA4]  99.3,43.28 180 bottom
U$176  [5V0]  100.32,50.9 180 bottom
U$177  [GPIOA5]  97.9,35.66 180 bottom
U$178  [QWIIC0]  91.55,50.39 180 bottom
U$179  [LIDAR#LITE1]  91.55,52.17 180 bottom
U$180  [PWR0]  105.27,31.47 180 top
U$181  LIDAR_LITE  [LIDAR_LITE]  83.41,41.89 180 bottom
U$182  [GND3]  113.38,48.36 180 bottom
U$183  [3V30]  113.51,45.82 180 bottom
U$184  SPARKX-LOGO4  [SPARKX-MEDIUM]  114.78,32.23 180 bottom
U$185  [GPIOB2]  112.24,38.2 180 bottom
U$186  [SCL1]  113.76,40.74 180 bottom
U$187  [SDA4]  113.51,43.28 180 bottom
U$188  [5V0]  114.52,50.9 180 bottom
U$189  [GPIOA5]  112.11,35.66 180 bottom
U$190  [QWIIC0]  105.76,50.39 180 bottom
U$191  [LIDAR#LITE1]  105.76,52.17 180 bottom
U$192  [PWR0]  119.47,31.47 180 top
U$193  LIDAR_LITE  [LIDAR_LITE]  -16.02,65.43 180 bottom  (outside the outline)
U$194  [GND3]  13.95,71.91 180 bottom
U$195  [3V30]  14.08,69.37 180 bottom
U$196  SPARKX-LOGO4  [SPARKX-MEDIUM]  15.35,55.78 180 bottom
U$197  [GPIOB2]  12.81,61.75 180 bottom
U$198  [SCL1]  14.33,64.29 180 bottom
U$199  [SDA4]  14.08,66.83 180 bottom
U$200  [5V0]  15.09,74.45 180 bottom
U$201  [GPIOA5]  12.68,59.21 180 bottom
U$202  [QWIIC0]  6.33,73.94 180 bottom
U$203  [LIDAR#LITE1]  6.33,75.72 180 bottom
U$204  [PWR0]  20.05,55.02 180 top
U$205  LIDAR_LITE  [LIDAR_LITE]  -1.82,65.43 180 bottom
U$206  [GND3]  28.15,71.91 180 bottom
U$207  [3V30]  28.28,69.37 180 bottom
U$208  SPARKX-LOGO4  [SPARKX-MEDIUM]  29.55,55.78 180 bottom
U$209  [GPIOB2]  27.01,61.75 180 bottom
U$210  [SCL1]  28.54,64.29 180 bottom
U$211  [SDA4]  28.28,66.83 180 bottom
U$212  [5V0]  29.3,74.45 180 bottom
U$213  [GPIOA5]  26.88,59.21 180 bottom
U$214  [QWIIC0]  20.53,73.94 180 bottom
U$215  [LIDAR#LITE1]  20.53,75.72 180 bottom
U$216  [PWR0]  34.25,55.02 180 top
U$217  LIDAR_LITE  [LIDAR_LITE]  12.39,65.43 180 bottom
U$218  [GND3]  42.36,71.91 180 bottom
U$219  [3V30]  42.49,69.37 180 bottom
U$220  SPARKX-LOGO4  [SPARKX-MEDIUM]  43.76,55.78 180 bottom
U$221  [GPIOB2]  41.22,61.75 180 bottom
U$222  [SCL1]  42.74,64.29 180 bottom
U$223  [SDA4]  42.49,66.83 180 bottom
U$224  [5V0]  43.5,74.45 180 bottom
U$225  [GPIOA5]  41.09,59.21 180 bottom
U$226  [QWIIC0]  34.74,73.94 180 bottom
U$227  [LIDAR#LITE1]  34.74,75.72 180 bottom
U$228  [PWR0]  48.45,55.02 180 top
U$229  LIDAR_LITE  [LIDAR_LITE]  26.59,65.43 180 bottom
U$230  [GND3]  56.56,71.91 180 bottom
U$231  [3V30]  56.69,69.37 180 bottom
U$232  SPARKX-LOGO4  [SPARKX-MEDIUM]  57.96,55.78 180 bottom
U$233  [GPIOB2]  55.42,61.75 180 bottom
U$234  [SCL1]  56.94,64.29 180 bottom
U$235  [SDA4]  56.69,66.83 180 bottom
U$236  [5V0]  57.71,74.45 180 bottom
U$237  [GPIOA5]  55.29,59.21 180 bottom
U$238  [QWIIC0]  48.94,73.94 180 bottom
U$239  [LIDAR#LITE1]  48.94,75.72 180 bottom
U$240  [PWR0]  62.66,55.02 180 top
U$241  LIDAR_LITE  [LIDAR_LITE]  40.79,65.43 180 bottom
U$242  [GND3]  70.77,71.91 180 bottom
U$243  [3V30]  70.89,69.37 180 bottom
U$244  SPARKX-LOGO4  [SPARKX-MEDIUM]  72.16,55.78 180 bottom
U$245  [GPIOB2]  69.62,61.75 180 bottom
U$246  [SCL1]  71.15,64.29 180 bottom
U$247  [SDA4]  70.89,66.83 180 bottom
U$248  [5V0]  71.91,74.45 180 bottom
U$249  [GPIOA5]  69.5,59.21 180 bottom
U$250  [QWIIC0]  63.15,73.94 180 bottom
U$251  [LIDAR#LITE1]  63.15,75.72 180 bottom
U$252  [PWR0]  76.86,55.02 180 top
U$253  LIDAR_LITE  [LIDAR_LITE]  55,65.43 180 bottom
U$254  [GND3]  84.97,71.91 180 bottom
U$255  [3V30]  85.1,69.37 180 bottom
U$256  SPARKX-LOGO4  [SPARKX-MEDIUM]  86.37,55.78 180 bottom
U$257  [GPIOB2]  83.83,61.75 180 bottom
U$258  [SCL1]  85.35,64.29 180 bottom
U$259  [SDA4]  85.1,66.83 180 bottom
U$260  [5V0]  86.11,74.45 180 bottom
U$261  [GPIOA5]  83.7,59.21 180 bottom
U$262  [QWIIC0]  77.35,73.94 180 bottom
U$263  [LIDAR#LITE1]  77.35,75.72 180 bottom
U$264  [PWR0]  91.07,55.02 180 top
U$265  LIDAR_LITE  [LIDAR_LITE]  69.2,65.43 180 bottom
U$266  [GND3]  99.17,71.91 180 bottom
U$267  [3V30]  99.3,69.37 180 bottom
U$268  SPARKX-LOGO4  [SPARKX-MEDIUM]  100.57,55.78 180 bottom
U$269  [GPIOB2]  98.03,61.75 180 bottom
U$270  [SCL1]  99.56,64.29 180 bottom
U$271  [SDA4]  99.3,66.83 180 bottom
U$272  [5V0]  100.32,74.45 180 bottom
U$273  [GPIOA5]  97.9,59.21 180 bottom
U$274  [QWIIC0]  91.55,73.94 180 bottom
U$275  [LIDAR#LITE1]  91.55,75.72 180 bottom
U$276  [PWR0]  105.27,55.02 180 top
U$277  LIDAR_LITE  [LIDAR_LITE]  83.41,65.43 180 bottom
U$278  [GND3]  113.38,71.91 180 bottom
U$279  [3V30]  113.51,69.37 180 bottom
U$280  SPARKX-LOGO4  [SPARKX-MEDIUM]  114.78,55.78 180 bottom
U$281  [GPIOB2]  112.24,61.75 180 bottom
U$282  [SCL1]  113.76,64.29 180 bottom
U$283  [SDA4]  113.51,66.83 180 bottom
U$284  [5V0]  114.52,74.45 180 bottom
U$285  [GPIOA5]  112.11,59.21 180 bottom
U$286  [QWIIC0]  105.76,73.94 180 bottom
U$287  [LIDAR#LITE1]  105.76,75.72 180 bottom
U$288  [PWR0]  119.47,55.02 180 top
U$289  LIDAR_LITE  [LIDAR_LITE]  -16.02,88.98 180 bottom  (outside the outline)
U$290  [GND3]  13.95,95.45 180 bottom
U$291  [3V30]  14.08,92.91 180 bottom
U$292  SPARKX-LOGO4  [SPARKX-MEDIUM]  15.35,79.33 180 bottom
U$293  [GPIOB2]  12.81,85.29 180 bottom
U$294  [SCL1]  14.33,87.83 180 bottom
U$295  [SDA4]  14.08,90.37 180 bottom
U$296  [5V0]  15.09,97.99 180 bottom
U$297  [GPIOA5]  12.68,82.75 180 bottom
U$298  [QWIIC0]  6.33,97.49 180 bottom
U$299  [LIDAR#LITE1]  6.33,99.26 180 bottom
U$300  [PWR0]  20.05,78.56 180 top
U$301  LIDAR_LITE  [LIDAR_LITE]  -1.82,88.98 180 bottom
U$302  [GND3]  28.15,95.45 180 bottom
U$303  [3V30]  28.28,92.91 180 bottom
U$304  SPARKX-LOGO4  [SPARKX-MEDIUM]  29.55,79.33 180 bottom
U$305  [GPIOB2]  27.01,85.29 180 bottom
U$306  [SCL1]  28.54,87.83 180 bottom
U$307  [SDA4]  28.28,90.37 180 bottom
U$308  [5V0]  29.3,97.99 180 bottom
U$309  [GPIOA5]  26.88,82.75 180 bottom
U$310  [QWIIC0]  20.53,97.49 180 bottom
U$311  [LIDAR#LITE1]  20.53,99.26 180 bottom
U$312  [PWR0]  34.25,78.56 180 top
U$313  LIDAR_LITE  [LIDAR_LITE]  12.39,88.98 180 bottom
U$314  [GND3]  42.36,95.45 180 bottom
U$315  [3V30]  42.49,92.91 180 bottom
U$316  SPARKX-LOGO4  [SPARKX-MEDIUM]  43.76,79.33 180 bottom
U$317  [GPIOB2]  41.22,85.29 180 bottom
U$318  [SCL1]  42.74,87.83 180 bottom
U$319  [SDA4]  42.49,90.37 180 bottom
U$320  [5V0]  43.5,97.99 180 bottom
U$321  [GPIOA5]  41.09,82.75 180 bottom
U$322  [QWIIC0]  34.74,97.49 180 bottom
U$323  [LIDAR#LITE1]  34.74,99.26 180 bottom
U$324  [PWR0]  48.45,78.56 180 top
U$325  LIDAR_LITE  [LIDAR_LITE]  26.59,88.98 180 bottom
U$326  [GND3]  56.56,95.45 180 bottom
U$327  [3V30]  56.69,92.91 180 bottom
U$328  SPARKX-LOGO4  [SPARKX-MEDIUM]  57.96,79.33 180 bottom
U$329  [GPIOB2]  55.42,85.29 180 bottom
U$330  [SCL1]  56.94,87.83 180 bottom
U$331  [SDA4]  56.69,90.37 180 bottom
U$332  [5V0]  57.71,97.99 180 bottom
U$333  [GPIOA5]  55.29,82.75 180 bottom
U$334  [QWIIC0]  48.94,97.49 180 bottom
U$335  [LIDAR#LITE1]  48.94,99.26 180 bottom
U$336  [PWR0]  62.66,78.56 180 top
U$337  LIDAR_LITE  [LIDAR_LITE]  40.79,88.98 180 bottom
U$338  [GND3]  70.77,95.45 180 bottom
U$339  [3V30]  70.89,92.91 180 bottom
U$340  SPARKX-LOGO4  [SPARKX-MEDIUM]  72.16,79.33 180 bottom
U$341  [GPIOB2]  69.62,85.29 180 bottom
U$342  [SCL1]  71.15,87.83 180 bottom
U$343  [SDA4]  70.89,90.37 180 bottom
U$344  [5V0]  71.91,97.99 180 bottom
U$345  [GPIOA5]  69.5,82.75 180 bottom
U$346  [QWIIC0]  63.15,97.49 180 bottom
U$347  [LIDAR#LITE1]  63.15,99.26 180 bottom
U$348  [PWR0]  76.86,78.56 180 top
U$349  LIDAR_LITE  [LIDAR_LITE]  55,88.98 180 bottom
U$350  [GND3]  84.97,95.45 180 bottom
U$351  [3V30]  85.1,92.91 180 bottom
U$352  SPARKX-LOGO4  [SPARKX-MEDIUM]  86.37,79.33 180 bottom
U$353  [GPIOB2]  83.83,85.29 180 bottom
U$354  [SCL1]  85.35,87.83 180 bottom
U$355  [SDA4]  85.1,90.37 180 bottom
U$356  [5V0]  86.11,97.99 180 bottom
U$357  [GPIOA5]  83.7,82.75 180 bottom
U$358  [QWIIC0]  77.35,97.49 180 bottom
U$359  [LIDAR#LITE1]  77.35,99.26 180 bottom
U$360  [PWR0]  91.07,78.56 180 top
U$361  LIDAR_LITE  [LIDAR_LITE]  69.2,88.98 180 bottom
U$362  [GND3]  99.17,95.45 180 bottom
U$363  [3V30]  99.3,92.91 180 bottom
U$364  SPARKX-LOGO4  [SPARKX-MEDIUM]  100.57,79.33 180 bottom
U$365  [GPIOB2]  98.03,85.29 180 bottom
U$366  [SCL1]  99.56,87.83 180 bottom
U$367  [SDA4]  99.3,90.37 180 bottom
U$368  [5V0]  100.32,97.99 180 bottom
U$369  [GPIOA5]  97.9,82.75 180 bottom
U$370  [QWIIC0]  91.55,97.49 180 bottom
U$371  [LIDAR#LITE1]  91.55,99.26 180 bottom
U$372  [PWR0]  105.27,78.56 180 top
U$373  LIDAR_LITE  [LIDAR_LITE]  83.41,88.98 180 bottom
U$374  [GND3]  113.38,95.45 180 bottom
U$375  [3V30]  113.51,92.91 180 bottom
U$376  SPARKX-LOGO4  [SPARKX-MEDIUM]  114.78,79.33 180 bottom
U$377  [GPIOB2]  112.24,85.29 180 bottom
U$378  [SCL1]  113.76,87.83 180 bottom
U$379  [SDA4]  113.51,90.37 180 bottom
U$380  [5V0]  114.52,97.99 180 bottom
U$381  [GPIOA5]  112.11,82.75 180 bottom
U$382  [QWIIC0]  105.76,97.49 180 bottom
U$383  [LIDAR#LITE1]  105.76,99.26 180 bottom
U$384  [PWR0]  119.47,78.56 180 top

## Library data of the parts
C1 C3 C5 C7 C9 C11 C13 C15 C17 C19 C21 C23 C25 C27 C29 C31 C33 C35 C37 C39 C41 C43 C45 C47 C49 C51 C53 C55 C57 C59 C61 C63 = SparkFun-Capacitors; PROD_ID: CAP-08280
C2 C4 C6 C8 C10 C12 C14 C16 C18 C20 C22 C24 C26 C28 C30 C32 C34 C36 C38 C40 C42 C44 C46 C48 C50 C52 C54 C56 C58 C60 C62 C64 = SparkFun-Capacitors; PROD_ID: CAP-11015
D1-D32 = SparkFun-LED; PROD_ID: DIO-00819
E$1 E$2 LOGO1-LOGO32 = SparkFun-Aesthetics
E$3 = SparkFun-Retired
J1 J2 J5 J7 J9 J11 J13 J15 J17 J19 J21 J23 J25 J27 J29 J31 J33 J35 J37 J39 J41 J43 J45 J47 J49 J51 J53 J55 J57 J59 J61 J63 J65 J67 J69 J71 J73 J75 J77 J79 J81 J83 J85 J87 J89 J91 J93 J95 J97 J99 J101 J103 J105 J107 J109 J111 J113 J115 J117 J119 J121 J123 J125 J127 = SparkFun-Connectors; PROD_ID: CONN-13694
J3 J4 J6 J8 J10 J12 J14 J16 J18 J20 J22 J24 J26 J28 J30 J32 J34 J36 J38 J40 J42 J44 J46 J48 J50 J52 J54 J56 J58 J60 J62 J64 J66 J68 J70 J72 J74 J76 J78 J80 J82 J84 J86 J88 J90 J92 J94 J96 J98 J100 J102 J104 J106 J108 J110 J112 J114 J116 J118 J120 J122 J124 J126 J128 = SparkFun-Connectors
L1-L32 = SparkFun-Coils; PROD_ID: NDUC-10146
R1-R32 = SparkFun-Resistors; PROD_ID: RES-07856
U1-U32 = SparkFun-IC-Power
U$1-U$6 U$14 U$15 U$17-U$19 U$21 U$26 U$27 U$29-U$31 U$33 U$38 U$39 U$41-U$43 U$45 U$50 U$51 U$53-U$55 U$57 U$62 U$63 U$65-U$67 U$69 U$74 U$75 U$77-U$79 U$81 U$86 U$87 U$89-U$91 U$93 U$98 U$99 U$101-U$103 U$105 U$110 U$111 U$113-U$115 U$117 U$122 U$123 U$125-U$127 U$129 U$134 U$135 U$137-U$139 U$141 U$146 U$147 U$149-U$151 U$153 U$158 U$159 U$161-U$163 U$165 U$170 U$171 U$173-U$175 U$177 U$182 U$183 U$185-U$187 U$189 U$194 U$195 U$197-U$199 U$201 U$206 U$207 U$209-U$211 U$213 U$218 U$219 U$221-U$223 U$225 U$230 U$231 U$233-U$235 U$237 U$242 U$243 U$245-U$247 U$249 U$254 U$255 U$257-U$259 U$261 U$266 U$267 U$269-U$271 U$273 U$278 U$279 U$281-U$283 U$285 U$290 U$291 U$293-U$295 U$297 U$302 U$303 U$305-U$307 U$309 U$314 U$315 U$317-U$319 U$321 U$326 U$327 U$329-U$331 U$333 U$338 U$339 U$341-U$343 U$345 U$350 U$351 U$353-U$355 U$357 U$362 U$363 U$365-U$367 U$369 U$374 U$375 U$377-U$379 U$381 = buzzard_labels (2)
U$7 U$13 U$25 U$37 U$49 U$61 U$73 U$85 U$97 U$109 U$121 U$133 U$145 U$157 U$169 U$181 U$193 U$205 U$217 U$229 U$241 U$253 U$265 U$277 U$289 U$301 U$313 U$325 U$337 U$349 U$361 U$373 = Qwiic_Lidar_Lite
U$8 U$16 U$28 U$40 U$52 U$64 U$76 U$88 U$100 U$112 U$124 U$136 U$148 U$160 U$172 U$184 U$196 U$208 U$220 U$232 U$244 U$256 U$268 U$280 U$292 U$304 U$316 U$328 U$340 U$352 U$364 U$376 = SparkX
U$9 U$11 U$22 U$23 U$34 U$35 U$46 U$47 U$58 U$59 U$70 U$71 U$82 U$83 U$94 U$95 U$106 U$107 U$118 U$119 U$130 U$131 U$142 U$143 U$154 U$155 U$166 U$167 U$178 U$179 U$190 U$191 U$202 U$203 U$214 U$215 U$226 U$227 U$238 U$239 U$250 U$251 U$262 U$263 U$274 U$275 U$286 U$287 U$298 U$299 U$310 U$311 U$322 U$323 U$334 U$335 U$346 U$347 U$358 U$359 U$370 U$371 U$382 U$383 = buzzard_labels (5)
U$10 U$20 U$32 U$44 U$56 U$68 U$80 U$92 U$104 U$116 U$128 U$140 U$152 U$164 U$176 U$188 U$200 U$212 U$224 U$236 U$248 U$260 U$272 U$284 U$296 U$308 U$320 U$332 U$344 U$356 U$368 U$380 = buzzard_labels (4)
U$12 U$24 U$36 U$48 U$60 U$72 U$84 U$96 U$108 U$120 U$132 U$144 U$156 U$168 U$180 U$192 U$204 U$216 U$228 U$240 U$252 U$264 U$276 U$288 U$300 U$312 U$324 U$336 U$348 U$360 U$372 U$384 = buzzard_labels (6)

## Nets
3.3V: C1.2 J1.2 J2.2 J4.5 L1.P$1 R1.2 U1.1 U1.3
3.3V1: C3.2 J5.2 J7.2 J8.5 L2.P$1 R2.2 U2.1 U2.3
3.3V2: C5.2 J9.2 J11.2 J12.5 L3.P$1 R3.2 U3.1 U3.3
3.3V3: C7.2 J13.2 J15.2 J16.5 L4.P$1 R4.2 U4.1 U4.3
3.3V4: C9.2 J17.2 J19.2 J20.5 L5.P$1 R5.2 U5.1 U5.3
3.3V5: C11.2 J21.2 J23.2 J24.5 L6.P$1 R6.2 U6.1 U6.3
3.3V6: C13.2 J25.2 J27.2 J28.5 L7.P$1 R7.2 U7.1 U7.3
3.3V7: C15.2 J29.2 J31.2 J32.5 L8.P$1 R8.2 U8.1 U8.3
3.3V8: C17.2 J33.2 J35.2 J36.5 L9.P$1 R9.2 U9.1 U9.3
3.3V9: C19.2 J37.2 J39.2 J40.5 L10.P$1 R10.2 U10.1 U10.3
3.3V10: C21.2 J41.2 J43.2 J44.5 L11.P$1 R11.2 U11.1 U11.3
3.3V11: C23.2 J45.2 J47.2 J48.5 L12.P$1 R12.2 U12.1 U12.3
3.3V12: C25.2 J49.2 J51.2 J52.5 L13.P$1 R13.2 U13.1 U13.3
3.3V13: C27.2 J53.2 J55.2 J56.5 L14.P$1 R14.2 U14.1 U14.3
3.3V14: C29.2 J57.2 J59.2 J60.5 L15.P$1 R15.2 U15.1 U15.3
3.3V15: C31.2 J61.2 J63.2 J64.5 L16.P$1 R16.2 U16.1 U16.3
3.3V16: C33.2 J65.2 J67.2 J68.5 L17.P$1 R17.2 U17.1 U17.3
3.3V17: C35.2 J69.2 J71.2 J72.5 L18.P$1 R18.2 U18.1 U18.3
3.3V18: C37.2 J73.2 J75.2 J76.5 L19.P$1 R19.2 U19.1 U19.3
3.3V19: C39.2 J77.2 J79.2 J80.5 L20.P$1 R20.2 U20.1 U20.3
3.3V20: C41.2 J81.2 J83.2 J84.5 L21.P$1 R21.2 U21.1 U21.3
3.3V21: C43.2 J85.2 J87.2 J88.5 L22.P$1 R22.2 U22.1 U22.3
3.3V22: C45.2 J89.2 J91.2 J92.5 L23.P$1 R23.2 U23.1 U23.3
3.3V23: C47.2 J93.2 J95.2 J96.5 L24.P$1 R24.2 U24.1 U24.3
3.3V24: C49.2 J97.2 J99.2 J100.5 L25.P$1 R25.2 U25.1 U25.3
3.3V25: C51.2 J101.2 J103.2 J104.5 L26.P$1 R26.2 U26.1 U26.3
3.3V26: C53.2 J105.2 J107.2 J108.5 L27.P$1 R27.2 U27.1 U27.3
3.3V27: C55.2 J109.2 J111.2 J112.5 L28.P$1 R28.2 U28.1 U28.3
3.3V28: C57.2 J113.2 J115.2 J116.5 L29.P$1 R29.2 U29.1 U29.3
3.3V29: C59.2 J117.2 J119.2 J120.5 L30.P$1 R30.2 U30.1 U30.3
3.3V30: C61.2 J121.2 J123.2 J124.5 L31.P$1 R31.2 U31.1 U31.3
3.3V31: C63.2 J125.2 J127.2 J128.5 L32.P$1 R32.2 U32.1 U32.3
5V: C2.2 J3.1 J4.7 U1.4
5V1: C4.2 J6.1 J8.7 U2.4
5V2: C6.2 J10.1 J12.7 U3.4
5V3: C8.2 J14.1 J16.7 U4.4
5V4: C10.2 J18.1 J20.7 U5.4
5V5: C12.2 J22.1 J24.7 U6.4
5V6: C14.2 J26.1 J28.7 U7.4
5V7: C16.2 J30.1 J32.7 U8.4
5V8: C18.2 J34.1 J36.7 U9.4
5V9: C20.2 J38.1 J40.7 U10.4
5V10: C22.2 J42.1 J44.7 U11.4
5V11: C24.2 J46.1 J48.7 U12.4
5V12: C26.2 J50.1 J52.7 U13.4
5V13: C28.2 J54.1 J56.7 U14.4
5V14: C30.2 J58.1 J60.7 U15.4
5V15: C32.2 J62.1 J64.7 U16.4
5V16: C34.2 J66.1 J68.7 U17.4
5V17: C36.2 J70.1 J72.7 U18.4
5V18: C38.2 J74.1 J76.7 U19.4
5V19: C40.2 J78.1 J80.7 U20.4
5V20: C42.2 J82.1 J84.7 U21.4
5V21: C44.2 J86.1 J88.7 U22.4
5V22: C46.2 J90.1 J92.7 U23.4
5V23: C48.2 J94.1 J96.7 U24.4
5V24: C50.2 J98.1 J100.7 U25.4
5V25: C52.2 J102.1 J104.7 U26.4
5V26: C54.2 J106.1 J108.7 U27.4
5V27: C56.2 J110.1 J112.7 U28.4
5V28: C58.2 J114.1 J116.7 U29.4
5V29: C60.2 J118.1 J120.7 U30.4
5V30: C62.2 J122.1 J124.7 U31.4
5V31: C64.2 J126.1 J128.7 U32.4
GND: C1.1 C2.1 D1.C J1.1 J2.1 J3.2 J4.6 U1.2
GND1: C3.1 C4.1 D2.C J5.1 J6.2 J7.1 J8.6 U2.2
GND2: C5.1 C6.1 D3.C J9.1 J10.2 J11.1 J12.6 U3.2
GND3: C7.1 C8.1 D4.C J13.1 J14.2 J15.1 J16.6 U4.2
GND4: C9.1 C10.1 D5.C J17.1 J18.2 J19.1 J20.6 U5.2
GND5: C11.1 C12.1 D6.C J21.1 J22.2 J23.1 J24.6 U6.2
GND6: C13.1 C14.1 D7.C J25.1 J26.2 J27.1 J28.6 U7.2
GND7: C15.1 C16.1 D8.C J29.1 J30.2 J31.1 J32.6 U8.2
GND8: C17.1 C18.1 D9.C J33.1 J34.2 J35.1 J36.6 U9.2
GND9: C19.1 C20.1 D10.C J37.1 J38.2 J39.1 J40.6 U10.2
GND10: C21.1 C22.1 D11.C J41.1 J42.2 J43.1 J44.6 U11.2
GND11: C23.1 C24.1 D12.C J45.1 J46.2 J47.1 J48.6 U12.2
GND12: C25.1 C26.1 D13.C J49.1 J50.2 J51.1 J52.6 U13.2
GND13: C27.1 C28.1 D14.C J53.1 J54.2 J55.1 J56.6 U14.2
GND14: C29.1 C30.1 D15.C J57.1 J58.2 J59.1 J60.6 U15.2
GND15: C31.1 C32.1 D16.C J61.1 J62.2 J63.1 J64.6 U16.2
GND16: C33.1 C34.1 D17.C J65.1 J66.2 J67.1 J68.6 U17.2
GND17: C35.1 C36.1 D18.C J69.1 J70.2 J71.1 J72.6 U18.2
GND18: C37.1 C38.1 D19.C J73.1 J74.2 J75.1 J76.6 U19.2
GND19: C39.1 C40.1 D20.C J77.1 J78.2 J79.1 J80.6 U20.2
GND20: C41.1 C42.1 D21.C J81.1 J82.2 J83.1 J84.6 U21.2
GND21: C43.1 C44.1 D22.C J85.1 J86.2 J87.1 J88.6 U22.2
GND22: C45.1 C46.1 D23.C J89.1 J90.2 J91.1 J92.6 U23.2
GND23: C47.1 C48.1 D24.C J93.1 J94.2 J95.1 J96.6 U24.2
GND24: C49.1 C50.1 D25.C J97.1 J98.2 J99.1 J100.6 U25.2
GND25: C51.1 C52.1 D26.C J101.1 J102.2 J103.1 J104.6 U26.2
GND26: C53.1 C54.1 D27.C J105.1 J106.2 J107.1 J108.6 U27.2
GND27: C55.1 C56.1 D28.C J109.1 J110.2 J111.1 J112.6 U28.2
GND28: C57.1 C58.1 D29.C J113.1 J114.2 J115.1 J116.6 U29.2
GND29: C59.1 C60.1 D30.C J117.1 J118.2 J119.1 J120.6 U30.2
GND30: C61.1 C62.1 D31.C J121.1 J122.2 J123.1 J124.6 U31.2
GND31: C63.1 C64.1 D32.C J125.1 J126.2 J127.1 J128.6 U32.2
GPIOA: J3.5 J4.1
GPIOA1: J6.5 J8.1
GPIOA2: J10.5 J12.1
GPIOA3: J14.5 J16.1
GPIOA4: J18.5 J20.1
GPIOA5: J22.5 J24.1
GPIOA6: J26.5 J28.1
GPIOA7: J30.5 J32.1
GPIOA8: J34.5 J36.1
GPIOA9: J38.5 J40.1
GPIOA10: J42.5 J44.1
GPIOA11: J46.5 J48.1
GPIOA12: J50.5 J52.1
GPIOA13: J54.5 J56.1
GPIOA14: J58.5 J60.1
GPIOA15: J62.5 J64.1
GPIOA16: J66.5 J68.1
GPIOA17: J70.5 J72.1
GPIOA18: J74.5 J76.1
GPIOA19: J78.5 J80.1
GPIOA20: J82.5 J84.1
GPIOA21: J86.5 J88.1
GPIOA22: J90.5 J92.1
GPIOA23: J94.5 J96.1
GPIOA24: J98.5 J100.1
GPIOA25: J102.5 J104.1
GPIOA26: J106.5 J108.1
GPIOA27: J110.5 J112.1
GPIOA28: J114.5 J116.1
GPIOA29: J118.5 J120.1
GPIOA30: J122.5 J124.1
GPIOA31: J126.5 J128.1
GPIOB: J3.6 J4.2
GPIOB1: J6.6 J8.2
GPIOB2: J10.6 J12.2
GPIOB3: J14.6 J16.2
GPIOB4: J18.6 J20.2
GPIOB5: J22.6 J24.2
GPIOB6: J26.6 J28.2
GPIOB7: J30.6 J32.2
GPIOB8: J34.6 J36.2
GPIOB9: J38.6 J40.2
GPIOB10: J42.6 J44.2
GPIOB11: J46.6 J48.2
GPIOB12: J50.6 J52.2
GPIOB13: J54.6 J56.2
GPIOB14: J58.6 J60.2
GPIOB15: J62.6 J64.2
GPIOB16: J66.6 J68.2
GPIOB17: J70.6 J72.2
GPIOB18: J74.6 J76.2
GPIOB19: J78.6 J80.2
GPIOB20: J82.6 J84.2
GPIOB21: J86.6 J88.2
GPIOB22: J90.6 J92.2
GPIOB23: J94.6 J96.2
GPIOB24: J98.6 J100.2
GPIOB25: J102.6 J104.2
GPIOB26: J106.6 J108.2
GPIOB27: J110.6 J112.2
GPIOB28: J114.6 J116.2
GPIOB29: J118.6 J120.2
GPIOB30: J122.6 J124.2
GPIOB31: J126.6 J128.2
N$1: D1.A R1.1
N$2: L1.P$2 U1.5
N$3: L2.P$2 U2.5
N$4: D2.A R2.1
N$5: L3.P$2 U3.5
N$6: D3.A R3.1
N$7: L4.P$2 U4.5
N$8: D4.A R4.1
N$9: L5.P$2 U5.5
N$10: D5.A R5.1
N$11: L6.P$2 U6.5
N$12: D6.A R6.1
N$13: L7.P$2 U7.5
N$14: D7.A R7.1
N$15: L8.P$2 U8.5
N$16: D8.A R8.1
N$17: L9.P$2 U9.5
N$18: D9.A R9.1
N$19: L10.P$2 U10.5
N$20: D10.A R10.1
N$21: L11.P$2 U11.5
N$22: D11.A R11.1
N$23: L12.P$2 U12.5
N$24: D12.A R12.1
N$25: L13.P$2 U13.5
N$26: D13.A R13.1
N$27: L14.P$2 U14.5
N$28: D14.A R14.1
N$29: L15.P$2 U15.5
N$30: D15.A R15.1
N$31: L16.P$2 U16.5
N$32: D16.A R16.1
N$33: L17.P$2 U17.5
N$34: D17.A R17.1
N$35: L18.P$2 U18.5
N$36: D18.A R18.1
N$37: L19.P$2 U19.5
N$38: D19.A R19.1
N$39: L20.P$2 U20.5
N$40: D20.A R20.1
N$41: L21.P$2 U21.5
N$42: D21.A R21.1
N$43: L22.P$2 U22.5
N$44: D22.A R22.1
N$45: L23.P$2 U23.5
N$46: D23.A R23.1
N$47: L24.P$2 U24.5
N$48: D24.A R24.1
N$49: L25.P$2 U25.5
N$50: D25.A R25.1
N$51: L26.P$2 U26.5
N$52: D26.A R26.1
N$53: L27.P$2 U27.5
N$54: D27.A R27.1
N$55: L28.P$2 U28.5
N$56: D28.A R28.1
N$57: L29.P$2 U29.5
N$58: D29.A R29.1
N$59: L30.P$2 U30.5
N$60: D30.A R30.1
N$61: L31.P$2 U31.5
N$62: D31.A R31.1
N$63: L32.P$2 U32.5
N$64: D32.A R32.1
SCL: J1.4 J2.4 J3.4 J4.3
SCL1: J5.4 J6.4 J7.4 J8.3
SCL2: J9.4 J10.4 J11.4 J12.3
SCL3: J13.4 J14.4 J15.4 J16.3
SCL4: J17.4 J18.4 J19.4 J20.3
SCL5: J21.4 J22.4 J23.4 J24.3
SCL6: J25.4 J26.4 J27.4 J28.3
SCL7: J29.4 J30.4 J31.4 J32.3
SCL8: J33.4 J34.4 J35.4 J36.3
SCL9: J37.4 J38.4 J39.4 J40.3
SCL10: J41.4 J42.4 J43.4 J44.3
SCL11: J45.4 J46.4 J47.4 J48.3
SCL12: J49.4 J50.4 J51.4 J52.3
SCL13: J53.4 J54.4 J55.4 J56.3
SCL14: J57.4 J58.4 J59.4 J60.3
SCL15: J61.4 J62.4 J63.4 J64.3
SCL16: J65.4 J66.4 J67.4 J68.3
SCL17: J69.4 J70.4 J71.4 J72.3
SCL18: J73.4 J74.4 J75.4 J76.3
SCL19: J77.4 J78.4 J79.4 J80.3
SCL20: J81.4 J82.4 J83.4 J84.3
SCL21: J85.4 J86.4 J87.4 J88.3
SCL22: J89.4 J90.4 J91.4 J92.3
SCL23: J93.4 J94.4 J95.4 J96.3
SCL24: J97.4 J98.4 J99.4 J100.3
SCL25: J101.4 J102.4 J103.4 J104.3
SCL26: J105.4 J106.4 J107.4 J108.3
SCL27: J109.4 J110.4 J111.4 J112.3
SCL28: J113.4 J114.4 J115.4 J116.3
SCL29: J117.4 J118.4 J119.4 J120.3
SCL30: J121.4 J122.4 J123.4 J124.3
SCL31: J125.4 J126.4 J127.4 J128.3
SDA: J1.3 J2.3 J3.3 J4.4
SDA1: J5.3 J6.3 J7.3 J8.4
SDA2: J9.3 J10.3 J11.3 J12.4
SDA3: J13.3 J14.3 J15.3 J16.4
SDA4: J17.3 J18.3 J19.3 J20.4
SDA5: J21.3 J22.3 J23.3 J24.4
SDA6: J25.3 J26.3 J27.3 J28.4
SDA7: J29.3 J30.3 J31.3 J32.4
SDA8: J33.3 J34.3 J35.3 J36.4
SDA9: J37.3 J38.3 J39.3 J40.4
SDA10: J41.3 J42.3 J43.3 J44.4
SDA11: J45.3 J46.3 J47.3 J48.4
SDA12: J49.3 J50.3 J51.3 J52.4
SDA13: J53.3 J54.3 J55.3 J56.4
SDA14: J57.3 J58.3 J59.3 J60.4
SDA15: J61.3 J62.3 J63.3 J64.4
SDA16: J65.3 J66.3 J67.3 J68.4
SDA17: J69.3 J70.3 J71.3 J72.4
SDA18: J73.3 J74.3 J75.3 J76.4
SDA19: J77.3 J78.3 J79.3 J80.4
SDA20: J81.3 J82.3 J83.3 J84.4
SDA21: J85.3 J86.3 J87.3 J88.4
SDA22: J89.3 J90.3 J91.3 J92.4
SDA23: J93.3 J94.3 J95.3 J96.4
SDA24: J97.3 J98.3 J99.3 J100.4
SDA25: J101.3 J102.3 J103.3 J104.4
SDA26: J105.3 J106.3 J107.3 J108.4
SDA27: J109.3 J110.3 J111.3 J112.4
SDA28: J113.3 J114.3 J115.3 J116.4
SDA29: J117.3 J118.3 J119.3 J120.4
SDA30: J121.3 J122.3 J123.3 J124.4
SDA31: J125.3 J126.3 J127.3 J128.4

## Tracks (layer width: path | path; a pad name or v marks a point on that pad's centre or on a via)
3.3V  (via drill 0.3, 0.38)
  Top 0.254: 17.44,21.33 17.57,21.33 | 15.18,15.54 C1.2 | J1.2 11.91,25.35 v12.68,26.12 | J2.2 v10.9,10.97 | R1.2 v15.47,9.32
  Top 0.305: C1.2 L1.P$1 v15.22,18.09 | U1.3 17.44,23.23 17.76,22.91 | U1.1 17.44,21.33 17.76,21.65 17.76,22.91 | 17.57,21.33 v17.89,21.01 | J2.2 10.91,14.54 11.92,15.54 15.18,15.54 | J4.5 18.39,22.28 17.76,22.91
  Bottom 0.254: 17.89,20.75 v17.89,21.01 | v15.47,9.32 12.43,9.32 10.9,10.85 v10.9,10.97
  Bottom 0.305: v15.22,18.09 17.89,20.75 | v12.68,26.12 15.19,26.12 J4.5
3.3V1  (via drill 0.3, 0.38)
  Top 0.254: 31.64,21.33 31.77,21.33 | 29.39,15.54 C3.2 | J5.2 26.11,25.35 v26.88,26.12 | J7.2 25.11,12.11 v25.11,10.97 | R2.2 v29.68,9.32
  Top 0.305: C3.2 L2.P$1 v29.42,18.09 | U2.3 31.64,23.23 31.96,22.91 | U2.1 31.64,21.33 31.96,21.65 31.96,22.91 | 31.77,21.33 v32.09,21.01 | J7.2 25.11,14.54 26.12,15.54 29.39,15.54 | J8.5 32.59,22.28 31.96,22.91
  Bottom 0.254: 32.09,20.75 v32.09,21.01 | v29.68,9.32 26.63,9.32 25.11,10.85 v25.11,10.97
  Bottom 0.305: v29.42,18.09 32.09,20.75 | v26.88,26.12 29.39,26.12 J8.5
3.3V2  (via drill 0.3, 0.38)
  Top 0.254: 45.85,21.33 45.97,21.33 | 43.59,15.54 C5.2 | J9.2 40.32,25.35 v41.09,26.12 | J11.2 v39.31,10.97 | R3.2 v43.88,9.32
  Top 0.305: C5.2 L3.P$1 v43.63,18.09 | U3.3 45.85,23.23 46.17,22.91 | U3.1 45.85,21.33 46.17,21.65 46.17,22.91 | 45.97,21.33 v46.29,21.01 | J11.2 39.32,14.54 40.33,15.54 43.59,15.54 | J12.5 46.8,22.28 46.17,22.91
  Bottom 0.254: 46.29,20.75 v46.29,21.01 | v43.88,9.32 40.83,9.32 39.31,10.85 v39.31,10.97
  Bottom 0.305: v43.63,18.09 46.29,20.75 | v41.09,26.12 43.6,26.12 J12.5
3.3V3  (via drill 0.3, 0.38)
  Top 0.254: 60.05,21.33 60.18,21.33 | 57.79,15.54 C7.2 | J13.2 54.52,25.35 v55.29,26.12 | J15.2 v53.51,10.97 | R4.2 v58.09,9.32
  Top 0.305: C7.2 L4.P$1 v57.83,18.09 | U4.3 60.05,23.23 60.37,22.91 | U4.1 60.05,21.33 60.37,21.65 60.37,22.91 | 60.18,21.33 v60.5,21.01 | J15.2 53.52,14.54 54.53,15.54 57.79,15.54 | J16.5 61,22.28 60.37,22.91
  Bottom 0.254: 60.5,20.75 v60.5,21.01 | v58.09,9.32 55.04,9.32 53.51,10.85 v53.51,10.97
  Bottom 0.305: v57.83,18.09 60.5,20.75 | v55.29,26.12 57.8,26.12 J16.5
3.3V4  (via drill 0.3, 0.38)
  Top 0.254: 74.26,21.33 74.38,21.33 | 72,15.54 C9.2 | J17.2 68.73,25.35 v69.5,26.12 | J19.2 v67.72,10.97 | R5.2 v72.29,9.32
  Top 0.305: C9.2 L5.P$1 v72.04,18.09 | U5.3 74.26,23.23 74.58,22.91 | U5.1 74.26,21.33 74.58,21.65 74.58,22.91 | 74.38,21.33 v74.7,21.01 | J19.2 67.73,14.54 68.73,15.54 72,15.54 | J20.5 75.21,22.28 74.58,22.91
  Bottom 0.254: 74.7,20.75 v74.7,21.01 | v72.29,9.32 69.24,9.32 67.72,10.85 v67.72,10.97
  Bottom 0.305: v72.04,18.09 74.7,20.75 | v69.5,26.12 72,26.12 J20.5
3.3V5  (via drill 0.3, 0.38)
  Top 0.254: 88.46,21.33 88.59,21.33 | 86.2,15.54 C11.2 | J21.2 82.93,25.35 v83.7,26.12 | J23.2 v81.92,10.97 | R6.2 v86.49,9.32
  Top 0.305: C11.2 L6.P$1 v86.24,18.09 | U6.3 88.46,23.23 88.78,22.91 | U6.1 88.46,21.33 88.78,21.65 88.78,22.91 | 88.59,21.33 v88.91,21.01 | J23.2 81.93,14.54 82.94,15.54 86.2,15.54 | J24.5 89.41,22.28 88.78,22.91
  Bottom 0.254: 88.91,20.75 v88.91,21.01 | v86.49,9.32 83.45,9.32 81.92,10.85 v81.92,10.97
  Bottom 0.305: v86.24,18.09 88.91,20.75 | v83.7,26.12 86.21,26.12 J24.5
3.3V6  (via drill 0.3, 0.38)
  Top 0.254: 102.66,21.33 102.79,21.33 | 100.41,15.54 C13.2 | J25.2 97.13,25.35 v97.9,26.12 | J27.2 96.13,12.11 v96.13,10.97 | R7.2 v100.7,9.32
  Top 0.305: C13.2 L7.P$1 v100.44,18.09 | U7.3 102.66,23.23 102.98,22.91 | U7.1 102.66,21.33 102.98,21.65 102.98,22.91 | 102.79,21.33 v103.11,21.01 | J27.2 96.13,14.54 97.14,15.54 100.41,15.54 | J28.5 103.61,22.28 102.98,22.91
  Bottom 0.254: 103.11,20.75 v103.11,21.01 | v100.7,9.32 97.65,9.32 96.13,10.85 v96.13,10.97
  Bottom 0.305: v100.44,18.09 103.11,20.75 | v97.9,26.12 100.41,26.12 J28.5
3.3V7  (via drill 0.3, 0.38)
  Top 0.254: 116.87,21.33 117,21.33 | 114.61,15.54 C15.2 | J29.2 111.34,25.35 v112.11,26.12 | J31.2 v110.33,10.97 | R8.2 v114.9,9.32